# Altium PCB tmp235_Front_End_Siognal_Chain.PcbDoc
Units mil, origin at the board's own origin, x right, y up, seen from the top; angles counter-clockwise.
Board outline 2560 x 1190 mil, 5 copper layers (Top Layer, GND, 3V3, 5V, Bottom Layer), stack 24.902 mil thick; 35 components, 33 nets, 143 pads, 9 vias.
Unrouted connection lines stored in the file: 34.
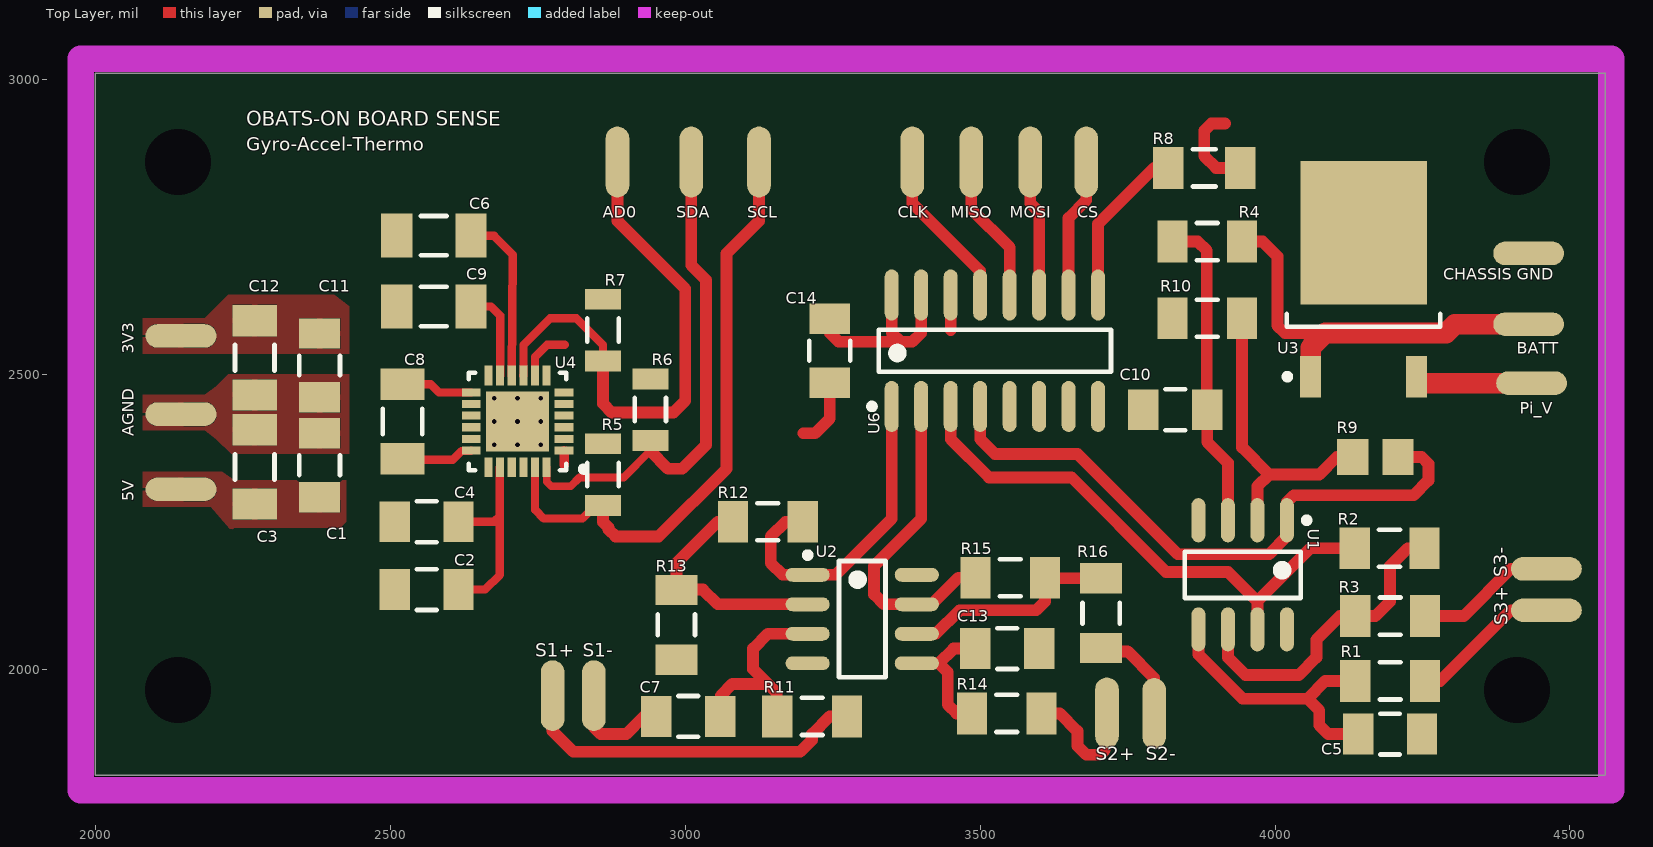
[diagram p0: Top Layer view]
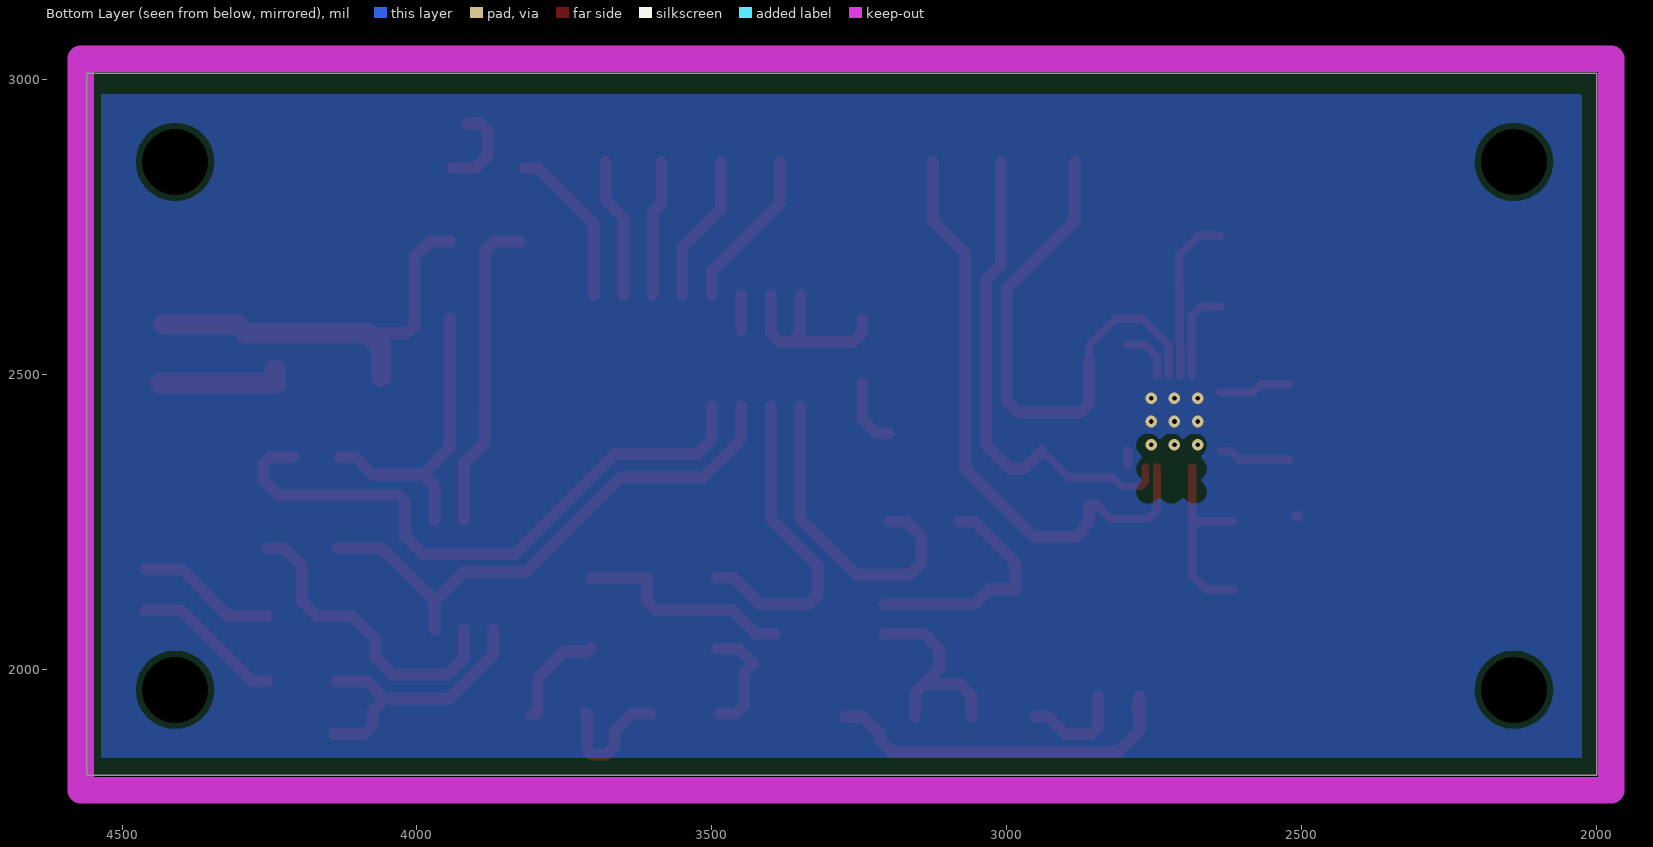
[diagram p1: Bottom Layer view, seen from below]
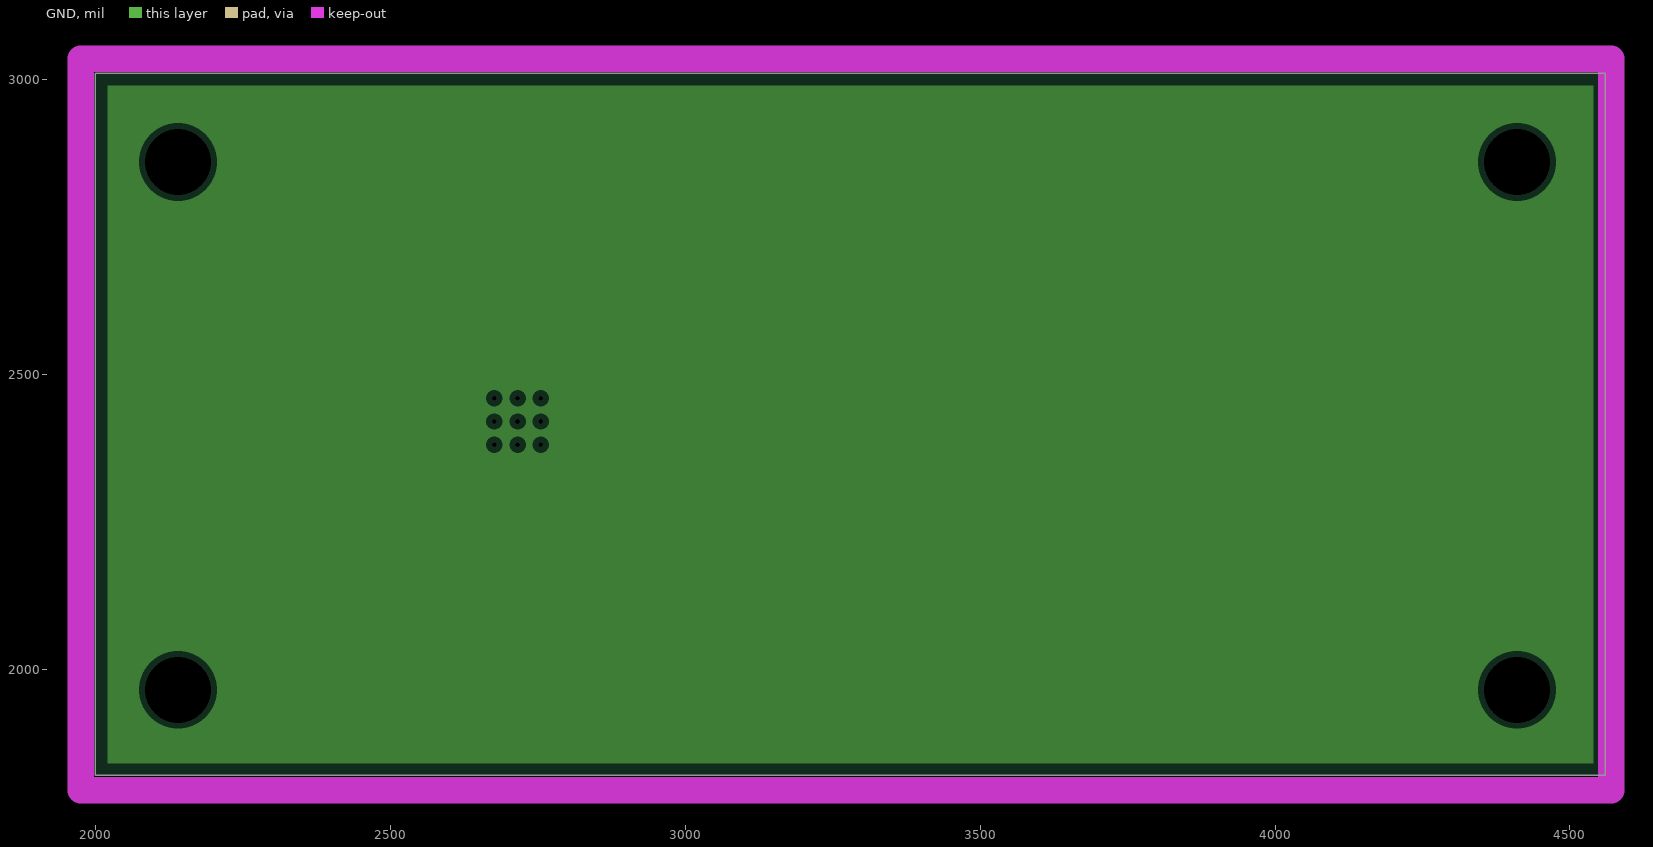
[diagram p2: GND, clearances drawn from the general rule]
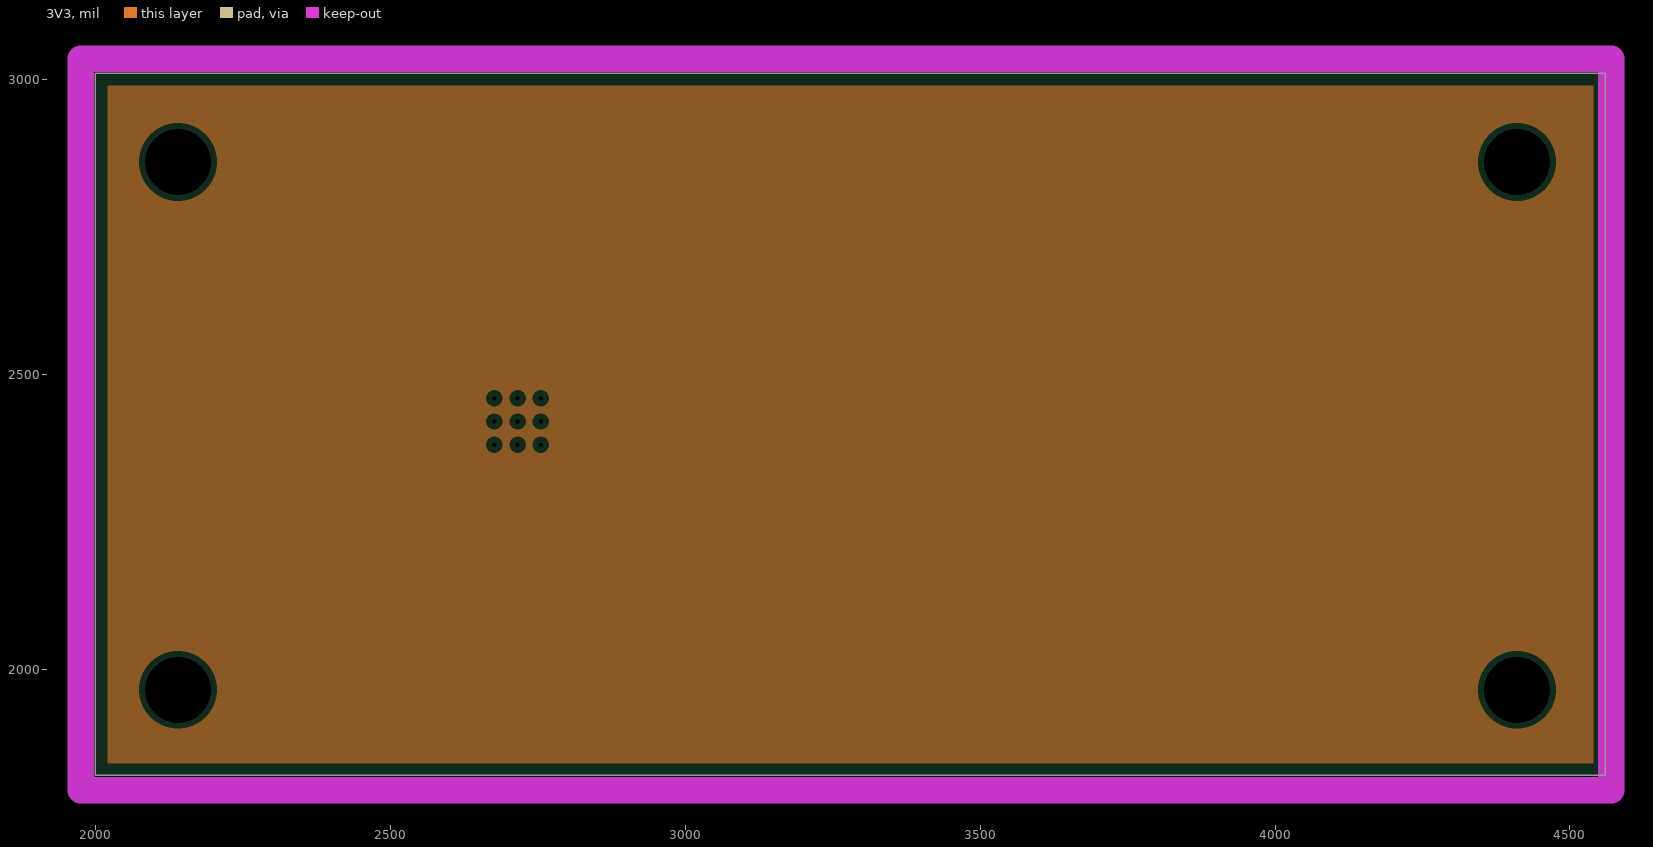
[diagram p3: 3V3, clearances drawn from the general rule]
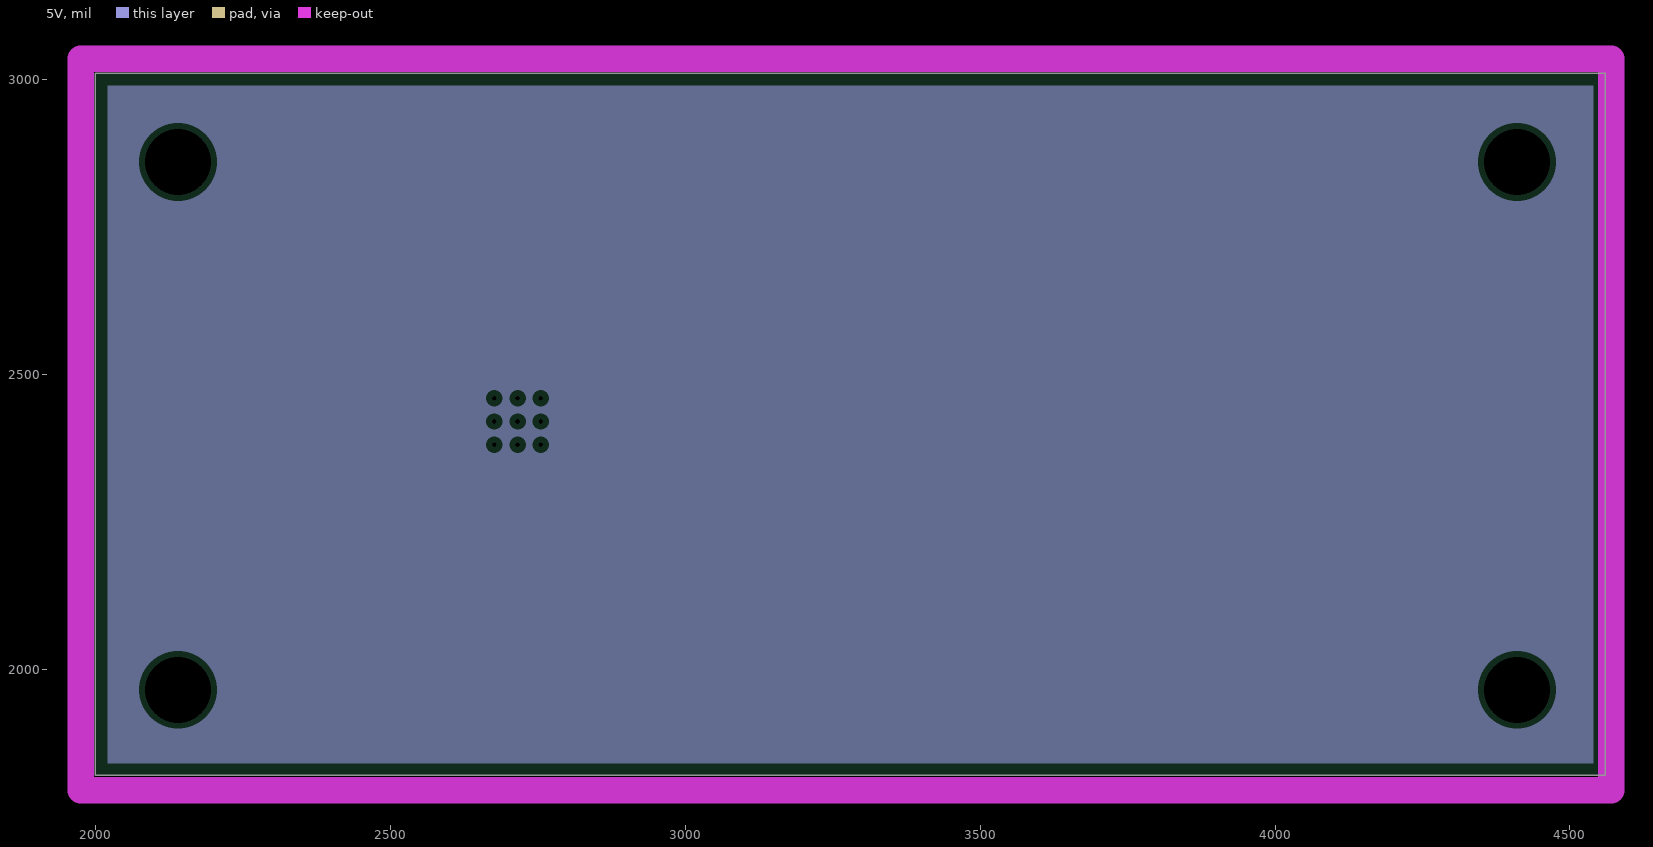
[diagram p4: 5V, clearances drawn from the general rule]

## Layer stack, top to bottom
Top Solder: solder mask 0.4, Solder Resist, Dk 3.5
Top Layer: signal copper 2.756
Dielectric 2: prepreg 2.8, PP-006, Dk 4.1
GND: plane copper 1.378, net AGND
Dielectric 1: dielectric 4.1, FR-4, Dk 4.8
3V3: plane copper 2.7559, net +3.3V_P
Dielectric 4: prepreg 2.8, PP-006, Dk 4.1
5V: plane copper 2.7559, net +5V_P
Dielectric 3: prepreg 2.8, PP-006, Dk 4.1
Bottom Layer: signal copper 2.756
Bottom Solder: solder mask 0.4, Solder Resist, Dk 3.5

## Board outline
2000,3010 2000,1820 4560,1820 4560,3010

## Design rules (kind name [scope] priority, off if disabled: settings)
Clearance Clearance_5 [InNamedPolygon('AGND_L05_P067')] p1: gap=10 ignorepadtopadclearanceinfootprint=FALSE except(0: Arc-Hole Track-Hole SMDPad-Hole THPad-Hole Via-Hole Fill-Hole Poly-Hole Region-Hole Text-Hole)
Clearance Clearance_4 [InNamedPolygon('AGND_L01_P065')] p2: gap=24 ignorepadtopadclearanceinfootprint=FALSE
Clearance Clearance_3 [InNamedPolygon('AGND_L01_P065')] p3: gap=30 ignorepadtopadclearanceinfootprint=FALSE
Clearance Clearance_2 [InNamedPolygon('AGND_L01_P065')] p4: gap=10 ignorepadtopadclearanceinfootprint=FALSE except(0: Arc-Hole Track-Hole SMDPad-Hole THPad-Hole Via-Hole Fill-Hole Poly-Hole Region-Hole Text-Hole)
Clearance Clearance_1 [InNamedPolygon('AGND_L01_P065')] p5: gap=10 ignorepadtopadclearanceinfootprint=FALSE except(0: Arc-Hole Track-Hole SMDPad-Hole THPad-Hole Via-Hole Fill-Hole Poly-Hole Region-Hole Text-Hole)
Clearance [All] p6 off: gap=10 ignorepadtopadclearanceinfootprint=FALSE except(0: Arc-Hole Track-Hole SMDPad-Hole THPad-Hole Via-Hole Fill-Hole Poly-Hole Region-Hole Text-Hole)
ComponentClearance [All] p1 off: gap=10 collisioncheckmode=3 verticalgap=10 showdistances=FALSE
Height [All] p1 off: minheight=0 maxheight=1000 prefheight=500
HoleSize [All] p1: absolutevalues=TRUE maxlimit=500 minlimit=1 maxpercent=80.000 minpercent=20.000
PlaneClearance [All] p1: clearance=10
PlaneConnect [All] p1: planeconnectstyle=Relief reliefexpansion=20 reliefentries=4 reliefconductorwidth=10 reliefairgap=10
PolygonConnect [All] p1 off: connectstyle=Relief reliefconductorwidth=10 reliefentries=4 polygonreliefangle="90 Angle" airgapwidth=10
RoomDefinition "Gyro Accel Temp MPU6050" [InComponentClass('Gyro Accel Temp MPU6050')] p1 off: confinementstyle=ConfineIn formatcopy=TRUE lockcomponents=FALSE outline 1935,1780 1990,1780 1990,1805 1935,1805
RoomDefinition ADC_MCP3008 [InComponentClass('ADC_MCP3008')] p2: confinementstyle=ConfineIn formatcopy=TRUE lockcomponents=FALSE outline 3420,2330 3370,2330 3370,2385 3420,2385
RoomDefinition Analog_Telem [InComponentClass('Analog_Telem')] p3 off: confinementstyle=ConfineIn formatcopy=TRUE lockcomponents=FALSE outline 1935,1765 1695,1765 1695,1545 1935,1545
RoutingVias [All] p1: holewidth=19 width=29 viastyle="Through Hole" minholewidth=10 minwidth=20 maxholewidth=35 maxwidth=50
SilkToSolderMaskClearance [IsPad] p1: minsilkscreentomaskgap=8 clearancetoexposedcopper=TRUE
SolderMaskExpansion [All] p1: expansion=4 istentingtop=FALSE
Width [All] p1 off: maxlimit=10 minlimit=10 preferedwidth=10
24 further rules are at their usual default settings.

## Classes and differential pairs
component class ADC_MCP3008: C14 R8 U6
component class "Gyro Accel Temp MPU6050": C2 C4 C6 C8 C9 C11 C12 R5 R6 R7 U4
component class Analog_Telem: C1 C3 C5 C7 C10 C13 R1 R2 R3 R4 R9 R10 R11 R12 R13 R14 R15 R16 U1 U2 U3

## Components (designator, comment, footprint, x,y, rotation, side; value= is the part's Value field where it differs from the comment)
C1 "1u" FP-CL31-IPC_B 2380,2345.81 r90 top
C2 "1u" FP-CL31-IPC_B 2561.44,2135 r180 top
C3 "0.1u" CAPC1206(3216)130_M 2270,2342.99 r270 top value=100nF
C4 "1u" FP-CL31-IPC_B 2561.44,2250 r180 top
C5 "1u" FP-CL31-IPC_B 4195,1890 r0 top
C6 "0.1u" CAPC1206(3216)130_M 2573.62,2735 r0 top value=100nF
C7 "1u" FP-CL31-IPC_B 3005,1920 r180 top
C8 "0.1u" CAPC1206(3216)130_M 2520.63,2420 r90 top value=100nF
C9 "0.1u" CAPC1206(3216)130_M 2573.62,2615 r0 top value=100nF
C10 "1u" FP-CL31-IPC_B 3830.81,2440 r180 top
C11 "1u" FP-CL31-IPC_B 2380,2515 r270 top
C12 "0.1u" CAPC1206(3216)130_M 2270,2527.99 r90 top value=100nF
C13 "1u" FP-CL31-IPC_B 3545.81,2035 r0 top
C14 "1u" FP-CL31-IPC_B 3245,2540 r270 top
R1 "10K" RESC3116X65X45ML10T20 4195,1980 r180 top
R2 "0" RESC3116X65X45ML10T20 4194.06,2205 r0 top
R3 "0" RESC3116X65X45ML10T20 4195,2090 r180 top
R4 "10K" RESC3116X65X45ML10T20 3885,2725 r180 top
R5 "4.7K" RESC3216X70X50LL05T20 2860.63,2330 r270 top
R6 "4.7K" RESC3216X70X50LL05T20 2940.63,2440 r270 top
R7 "4.7K" RESC3216X70X50LL05T20 2860.63,2575 r270 top
R8 "10" RESC3216X60X45ML10T20 3880,2850 r180 top
R9 "24K" RESC2013X70X40ML20T20 4170,2360 r0 top
R10 "10K" RESC3116X65X45ML10T20 3885,2595 r0 top
R11 "10K" RESC3116X65X45ML10T20 3215,1920 r180 top
R12 "0" RESC3116X65X45ML10T20 3140,2250 r180 top
R13 "0" RESC3116X65X45ML10T20 2985,2075 r90 top
R14 "10K" RESC3116X65X45ML10T20 3545,1925 r180 top
R15 "10K" RESC3116X65X45ML10T20 3550.94,2155 r0 top
R16 "0" RESC3116X65X45ML10T20 3705,2095 r90 top
U1 "OP284ESZ" ADI-R-8_L 3945,2160 r270 top
U2 "OP284ESZ" ADI-R-8_L 3300,2085 r0 top
U3 "L4941BDT-TR" TO-252_L 4150,2661.26 r90 top
U4 "MPU6050" INSE-QFN-24_V 2715.63,2420 r180 top
U6 "MCP3008T-I/SL" SOIC-SL16_N 3525,2540 r90 top

## Footprints (in the part's own frame and the unit in brackets; to place one, negate y for a bottom-side part, rotate by r counter-clockwise, add the part's x,y. Pads: shape width x height; smd on the part's side, far side on the other; paste and mask are expansions set on the pad)
ADI-R-8_L [mm] "SOIC, 8-Leads, Body 4.9x3.9mm, Pitch 1.27mm, IPC High Density"
  oval 1.9x0.6 smd: 1(-2.35,1.905) 2(-2.35,0.635) 3(-2.35,-0.635) 4(-2.35,-1.905) 5(2.35,-1.905) 6(2.35,-0.635) 7(2.35,0.635) 8(2.35,1.905)
  silkscreen extent -2.47,-2.5 1,2.88, body extent -2,-2.5 2,2.5, height 1.75
CAPC1206(3216)130_M [mm] "Chip Capacitor, Body 3.2x1.6mm, Height 1.3mm, IPC Low Density"
  rect 1.35x1.9 smd: 1(-1.6,0) 2(1.6,0)
  silkscreen extent -0.55,-0.85 0.55,0.85, body extent -1.7,-0.9 1.7,0.9, height 1.3
FP-CL31-IPC_B [mil]
  rect 51.4x69.22 smd paste+0 mask+0: 1(-54.19,0) 2(54.19,0)
  silkscreen extent -17,-35 17,35, body extent -90,-44 90,44, height 10
INSE-QFN-24_V [mm] "QFN, 24-Leads, Body 4.00x4.00mm, Pitch 0.50mm, Thermal Pad 2.7x2.6mm"
  rect 0.8x0.35 smd: 1(-2,1.25) 2(-2,0.75) 3(-2,0.25) 4(-2,-0.25) 5(-2,-0.75) 6(-2,-1.25) 13(2,-1.25) 14(2,-0.75) 15(2,-0.25) 16(2,0.25) 17(2,0.75) 18(2,1.25)
  rect 0.35x0.85 smd: 7(-1.25,-1.975) 8(-0.75,-1.975) 9(-0.25,-1.975) 10(0.25,-1.975) 11(0.75,-1.975) 12(1.25,-1.975) 19(1.25,1.975) 20(0.75,1.975) 21(0.25,1.975) 22(-0.25,1.975) 23(-0.75,1.975) 24(-1.25,1.975)
  rect 2.7x2.6 smd: 25(0,0)
  silkscreen extent -2.98,-2.1 2.1,2.17, body extent -2,-2 2,2, height 0.95
RESC2013X70X40ML20T20 [mm] "Chip Resistor, 2-Leads, Body 2.00x1.25mm, IPC Low Density"
  rect 1.35x1.55 smd: 1(-0.975,0) 2(0.975,0)
  body extent -1.1,-0.72 1.1,0.72, height 0.7
RESC3116X65X45ML10T20 [mm] "Chip Resistor, 2-Leads, Body 3.10x1.60mm, IPC Low Density"
  rect 1.3x1.8 smd: 1(-1.5,0) 2(1.5,0)
  silkscreen extent -0.45,-0.8 0.45,0.8, body extent -1.6,-0.85 1.6,0.85, height 0.65
RESC3216X60X45ML10T20 [mm] "Chip Resistor, 2-Leads, Body 3.20x1.60mm, IPC Low Density"
  rect 1.3x1.8 smd: 1(-1.55,0) 2(1.55,0)
  silkscreen extent -0.5,-0.8 0.5,0.8, body extent -1.65,-0.85 1.65,0.85, height 0.6
RESC3216X70X50LL05T20 [mm] "Chip Resistor, 2-Leads, Body 3.20x1.60mm, IPC High Density"
  rect 0.9x1.55 smd: 1(-1.325,0) 2(1.325,0)
  silkscreen extent -0.5,-0.67 0.5,0.67, body extent -1.63,-0.82 1.62,0.82, height 0.7
SOIC-SL16_N [mm] "SOIC, 16-Leads, Body 9.9x3.9mm, Pitch 1.27mm, IPC Medium Density"
  oval 2.2x0.6 smd: 1(-2.4,4.445) 2(-2.4,3.175) 3(-2.4,1.905) 4(-2.4,0.635) 5(-2.4,-0.635) 6(-2.4,-1.905) 7(-2.4,-3.175) 8(-2.4,-4.445) 9(2.4,-4.445) 10(2.4,-3.175) 11(2.4,-1.905) 12(2.4,-0.635) 13(2.4,0.635) 14(2.4,1.905) 15(2.4,3.175) 16(2.4,4.445)
  silkscreen extent -2.52,-5 0.9,5.42, body extent -2,-5 2,5, height 1.75
TO-252_L [mm] "D-PAK, 4-Leads, Body 6.1x6.5mm, Pitch 2.28mm, Lead Span 9.7mm, IPC High Density"
  rect 1.8x0.9 smd: 1(-4.2,2.28) 3(-4.2,-2.28)
  rect 6.2x5.45 smd: 4(2,0)
  silkscreen extent -4.32,-3.3 -1.5,3.4, body extent -2.05,-3.3 4.15,3.3, height 2.4

## Part data
C1 C2 C4 C5 C7 C10 C11 C13 C14: library part CMP-13271-001662-1, "Cap Ceramic 1uF 50V X7R ±10% SMD 1206 +125°C Embossed T/R", Capacitance=1uF, Case Code (Imperial)=1206, Case Code (Metric)=3216, Dielectric=X7R, Max Operating Temperature=125°C, Min Operating Temperature=-55°C, Package Quantity=1, Tolerance=10%, Voltage=50V, Case/Package=1206, Contact Plating=Tin, Depth=1.6mm, Height=1.6mm, Lead Free="Lead Free", Length=3.2mm, Material=Ceramic, Mount="Surface Mount", Packaging="Tape and Reel", Radiation Hardening=No, Thickness=0.071inch, Voltage Rating=50V, Voltage Rating (DC)=50V, Width=0.063inch
C3 C6 C8 C9 C12: library part CMP-1037-04215-1, "CAP 100nF 100V ±20% 1206 (3216 Metric) Thickness 1.3mm SMD", Case-EIA=1206, Case-Metric=3216, Rated Voltage="100 V", Tolerance=Â±20%, Max Thickness="1.3 mm", Technology=SMT
R1 R2 R3 R4 R10 R11 R12 R13 R14 R15 R16: library part CMP-2003-04910-1, Manufacturer=Yageo, Part Number=AC1206FR-0710KL
R5 R6 R7: library part CMP-2003-00848-1, Manufacturer=Panasonic, Part Number=ERJ8ENF4701V
R8: library part CMP-2003-04815-1, Manufacturer="Vishay Dale", Part Number=CRCW120610R0FKEA
R9: library part CMP-2001-00525-1, Manufacturer=Panasonic, Part Number=ERJ6ENF2402V
U1 U2: library part CMP-0384-00701-1, "Double Channel Single-Supply Operation Operational Amplifier, 4.25 MHz BW, 4 V/us SR, Industrial, 8-pin SOIC (R-8), Tube", Amplifiers Per Package=2, Generic Part Number=OP284, Input Bias Current=80nA, Input Offset Voltage=175uV, Manufacturer="Analog Devices", Code_JEDEC=MS-012-AA, ComponentLink1Description="Manufacturer URL", ComponentLink1URL=http://www.analog.com/en/index.html, ComponentLink2Description=Datasheet, ComponentLink2URL=http://www.analog.com/static/imported-files/data_sheets/OP184_284_484.pdf, ComponentLink3Description="Package Specification", ComponentLink3URL=http://www.analog.com/static/imported-files/packages/PKG_PDF/SOIC_Narrow%20(R)/R_8.pdf, DatasheetVersion="Rev. J", Iq/Amp=2mA, Mounting Technology="Surface Mount", PackageDescription="8-Pin Standard Small Outline Package, Body 3.9 x 4.9 mm, Pitch 1.27 mm", PackageReference=R-8, PackageVersion=060506-A, PartNumber=OP284ESZ, Slew Rate=4V/us, Small Signal Bandwidth=4.25MHz, V Span Max=36V, V Span Min=3V
U3: library part CMP-0244-00200-1, "1A Very Low Drop Regulator, 3-Pin DPAK, Tape and Reel", ComponentLink1Description="Manufacturer URL", ComponentLink1URL=http://www.st.com, ComponentLink2Description=Datasheet, ComponentLink2URL=http://www.st.com/internet/com/TECHNICAL_RESOURCES/TECHNICAL_LITERATURE/DATASHEET/CD00000443.pdf, DatasheetVersion=15/09/2006, PackageDescription="3-Pin Transistor Outline Package 2.28 mm Pitch, 9.7 mm Lead Span (DPAK)", PackageReference=TO-252, PackageVersion=2011
U4: library part CMP-1753-00002-1, "3-Axis Gyroscope, 3-Axis Accelerometer / , 2.375 to 3.46 V, -40 to 105 degC, 24-Pin QFN, RoHS, Tape and Reel", Case Code (Imperial)=0603, Case Code (Metric)=1608, Max Operating Temperature=155degC, Min Operating Temperature=-55degC, Package Quantity=5000, Power Rating="100 mW", Resistance="5.6 kohm", Tolerance=1%, Voltage Rating="75 V", Case/Package=0603, ComponentLink1Description="Manufacturer URL", ComponentLink1URL=http://www.invensense.com/, ComponentLink2Description=Datasheet, ComponentLink2URL=https://datasheet.ciiva.com/1513/1788002-1513632.pdf, DatasheetVersion="Rev. 3.4, 08/2013", Height="0.45 mm", Length="1.6 mm", Mount="Surface Mount", PackageDescription="24-Pin Quad Flat No-lead Package, Body 4 x 4 mm, Pitch 0.5 mm", PackageReference=QFN-24, Packaging="Tape and Reel", Pins=2, Radiation Hardening=No, REACH SVHC=Yes, RoHSCompliant=True, Width="0.8 mm"
U6: library part CMP-0188-00351-2, "2.7V 4-Channel/8-Channel 10-Bit A/D Converters with SPI Serial Interface, 16-Pin SOIC 150mil, Industrial Temperature, Tape and Reel", Code_IPC=SOIC127P600-16, Code_JEDEC=MS-012-AC, ComponentLink1Description="Manufacturer URL", ComponentLink1URL=http://www.microchip.com/, ComponentLink2Description=Datasheet, ComponentLink2URL=http://ww1.microchip.com/downloads/en/DeviceDoc/21295d.pdf, ComponentLink3Description="Package Specification", ComponentLink3URL=http://www.microchip.com/stellent/groups/techpub_sg/documents/packagingspec/en012702.pdf, DatasheetVersion="revD, Dec-2008", PackageDescription="16-Lead Plastic Small Outline (SL) - Narrow, 3.90mm Body [SOIC]", PackageReference=SOIC-SL16, PackageVersion="revBB, Aug-2009", RevisionNote="URLs added."

## Free pads (board coordinates)
  round 60 hole 112 unplated: 1(2140,2860) 1(4410,1965) 1(4410,2860) 2(2140,1965)
  oval 120x40 smd: 4(2145,2305) 4(2145,2432.5) 4(2145,2565) 4(4430,2585) 4(4430,2705) 4(4435,2485) 4(4460,2100) 4(4460,2170)
  oval 40x120 smd: 4(2775,1955) 4(2845,1955) 4(2885,2860) 4(3010,2860) 4(3125,2860) 4(3385,2860) 4(3485,2860) 4(3585,2860) 4(3680,2860) 4(3715,1926.01) 4(3795,1925)

## Via types
v1: diameter 19.68, hole 7.87, Top Layer to Bottom Layer, 9 vias

## Nets (pads, with @x,y where several pads share a name; then routed paths per layer and width w, separated by ;. In a path a pad name is that pad's centre, name@x,y a point inside that pad or via, vN(x,y) a via of type N, cw(c..) or ccw(c..) an arc to the next point about the centre after c; other vN are vias at no path point)
12V_BATT: pad.4@4430,2585 R4.1 U3.1 | length 709.9
  Top Layer w20: R4.1 3979.06,2725 4004.06,2700 4004.06,2582.66 4016.72,2570 4085,2570 ; U3.1@4054.88,2507.52 U3.1@4055.24,2507.17
  Top Layer w35: U3.1 4060.24,2545.24 4085,2570 4290,2570 4305,2585 pad.4@4430,2585
+3.3V_P: C8.2 C11.1 C12.2 pad.4@2145,2565 R5.1 R6.1 U4.8 U4.13 U6.6 | length 212.7
  Top Layer w14: C8.2 2568.62,2482.99 2582.29,2469.32 2636.78,2469.32 U4.13 ; U4.8 2745.16,2529.53 2765.63,2550 2795.63,2550
+5V_P: C1.1 C3.2 C14.1 pad.4@2145,2305 U1.8 U2.8 U6.8 U6.15 U6.16 | length 341.8
  Top Layer w20: C14.1 3245,2570 3260,2555 3365,2555 ; U6.16 3350,2570 3365,2555 ; U6.15 3400,2570 3385,2555 3365,2555
AGND: C1.2 C2.2 C3.1 C4.2 C5.2 C6.1 C7.2 C8.1 C9.1 C10.2 C11.2 C12.1 C13.2 C14.2 pad.4@2145,2432.5 pad.4@2845,1955 pad.4@3795,1925 pad.4@4460,2170 R3.1 R7.1 R8.1 R10.1 R13.1 R16.1 U1.4 U2.4 U4.1 U4.18 U6.5 U6.7 U6.14 | length 658.2
  Top Layer w14: C8.1@2520.63,2355 2605.63,2355 2620.63,2370 2636.1,2370 U4.18
  Top Layer w16: 2795,2345.63 U4.1@2795,2370.79
  Top Layer w20: C4.2@2507.26,2260 C4.2@2507.66,2259.59 ; 3200,2400 3220,2400 3245,2425 C14.2 ; 3450,2575 U6.14 ; R16.1 3710.94,2030 3750,2030 3795,1985 3795,1925 pad.4@3805,1922.01 ; 3915,2925 3891.72,2925 3880,2913.28 3880,2870 3900,2850 R8.1
DGND: R8.2 U6.9 | length 278.8
  Top Layer w20: U6.9 3700,2755 3795,2850 R8.2
GND: pad.4@4430,2705 U3.4
NetC2_1: C2.1 C4.1 U4.20 | length 336.8
  Top Layer w14: C2.1 2660.63,2135 2685.63,2160 2685.63,2260 ; C4.1 2675.63,2250 2685.63,2260 ; U4.20@2685.99,2342.13 2685.63,2341.77 2685.63,2260
NetC5_1: C5.1 R1.2 U1.5 | length 477.2
  Top Layer w20: U1.5 3870,2025 3945,1950 4055,1950 ; R1.2 4085,1980 4055,1950 ; C5.1 4090,1890 4075,1905 4075,1930 4055,1950
NetC6_2: C6.2 U4.10 | length 289.1
  Top Layer w14: C6.2 2675.93,2734.7 2707.36,2702.78 U4.10
NetC7_1: C7.1 R11.2 U2.3 | length 358.4
  Top Layer w20: C7.1 3060,1920.81 3060,1955 3080,1975 3140,1975 ; R11.2 3155,1920.94 3155,1960 3140,1975 ; U2.3 3140,2060 3115,2035 3115,2000 3140,1975
NetC9_2: C9.2 U4.11 | length 157.7
  Top Layer w14: C9.2 2670.63,2615 2686.1,2599.53 U4.11
NetC10_1: C10.1 R4.2 U1.3 | length 536.7
  Top Layer w20: R4.2 3869.06,2725 3884.06,2710 3884.06,2440.94 C10.1 3885,2385 3920,2350 U1.3
NetC13_1: C13.1 R14.2 U2.5 | length 195.4
  Top Layer w20: R14.2 3460,1925 3445,1940 3445,1995 3430,2010 3455,2035 C13.1
NetR1_1: pad.4@4460,2100 R1.1 | length 255.7
  Top Layer w20: R1.1 4280,1980 4400,2100 pad.4@4460,2100
NetR2_1: R2.1 U1.7 U6.3 | length 939.2
  Top Layer w20: U6.3 3450,2390 3515,2325 3655,2325 3815,2165 3920,2165 3970,2115 ; U1.7 3970,2115 ; R2.1 4060,2205 3970,2115
NetR2_2: R2.2 R3.2 U1.6 | length 534.8
  Top Layer w20: U1.6 3920,2020 3950,1990 4040,1990 4070,2020 4070,2050 4110,2090 R3.2 4170,2090 4195,2115 4195,2175 4225,2205 R2.2
NetR5_2: pad.4@3125,2860 R5.2 U4.23 | length 1042.7
  Top Layer w14: 2745.16,2270 U4.23 ; 2745.63,2270 2760,2255.63 2825.63,2255.63 R5.2@2847.83,2277.83
  Top Layer w20: R5.2@2847.83,2277.83 R5.2 2860.63,2249.37 2870,2240 2870,2236.72 2881.72,2225 2955,2225 3070,2340 3070,2705 3125,2760 pad.4@3125,2860
NetR6_2: pad.4@3010,2860 R6.2 U4.24 | length 841.9
  Top Layer w13: U4.24 2765.23,2341.85 2765.23,2317.62 2772.85,2310 2805.63,2310 2820.63,2325 2895.63,2325 2940.63,2370
  Top Layer w20: 2940.63,2370 2970.63,2340 2995,2340 3035,2380 3035,2660 3010,2685 pad.4@3010,2860
NetR7_2: pad.4@2885,2860 R7.2 U4.9 | length 931.1
  Top Layer w14: U4.9 U4.9 2725.51,2549.88 2770.63,2595 2815.63,2595 2860.63,2550 R7.2
  Top Layer w20: R7.2 2860.63,2450 2875.63,2435 2980,2435 3000,2455 3000,2645 2885,2760 pad.4@2885,2860
NetR9_1: R9.1 R10.2 U1.2 | length 523.8
  Top Layer w20: R10.2 3944.06,2375.94 3990,2330 ; U1.2 3970,2310 3990,2330 ; R9.1 4105,2360 4075,2330 4045,2330 3990,2330
NetR9_2: R9.2 U1.1 U6.4 | length 1067
  Top Layer w20: U6.4 3500,2390 3525,2365 3665,2365 3835,2195 3990,2195 4020,2225 U1.1 4020,2283.28 4031.72,2295 4235,2295 4260,2320 4260,2348.28 4248.28,2360 R9.2
NetR11_1: pad.4@2775,1955 R11.1 | length 628.4
  Top Layer w20: pad.4@2778.83,1931.17 2775,1955 2775,1895 2810,1860 3195,1860 3215,1880 3215,1890 3245,1920 R11.1
NetR12_1: R12.1 U2.1 U6.1 | length 552.6
  Top Layer w20: R12.1 3170,2250 3145,2225 3145,2180 3165,2160 U2.1 3255,2160 3350,2255 U6.1
NetR12_2: R12.2 R13.2 U2.2 | length 404.1
  Top Layer w20: R12.2 3055,2250 2985,2180 R13.2 2985.94,2135 3030,2135 3055,2110 U2.2
NetR14_1: pad.4@3715,1926.01 R14.1 | length 218.7
  Top Layer w20: R14.1 3635,1925 3665,1895 3665,1870 3680,1855 3703.28,1855 3711.17,1862.89 3711.17,1922.18 pad.4@3715,1926.01
NetR15_1: R15.1 U2.7 U6.2 | length 549.4
  Top Layer w20: U6.2 3400,2255 3320,2175 3320,2126.72 3336.72,2110 U2.7 3418.11,2110 3463.11,2155 R15.1
NetR15_2: R15.2 R16.2 U2.6 | length 375.7
  Top Layer w20: U2.6 3425,2060 3465,2100 3595,2100 3610,2115 R15.2 3610.94,2154.06 R16.2
NetU3_3: pad.4@4435,2485 U3.3 | length 217.6
  Top Layer w35: U3.3@4239.76,2507.4 U3.3 4239.76,2485 pad.4@4435,2485
NetU4_12: U4.12
NetU6_10: pad.4@3680,2860 U6.10 | length 237.9
  Top Layer w20: U6.10 3650,2765 3680,2795 pad.4@3680,2860
NetU6_11: pad.4@3585,2860 U6.11 | length 231.7
  Top Layer w20: pad.4@3585,2860 3585,2790 3600,2775 U6.11
NetU6_12: pad.4@3485,2860 U6.12 | length 252.4
  Top Layer w20: pad.4@3485,2860 3485,2780 3550,2715 U6.12
NetU6_13: pad.4@3385,2860 U6.13 | length 273.1
  Top Layer w20: pad.4@3385,2860 3385,2790 3500,2675 U6.13
pads on no net: U4.2 U4.3 U4.4 U4.5 U4.6 U4.7 U4.14 U4.15 U4.16 U4.17 U4.19 U4.21 U4.22 U4.25
copper on no net: | length 416.8
  Top Layer w20: 2845,1955 2845,1901.72 2856.72,1890 2900,1890 2930,1920 2950.81,1920 ; 3705,2035.94 3705.94,2035 ; 4254.06,2090 4320,2090 4400,2170 4460,2170
  other v1: 2676.26,2380.63 2715.63,2380.63 2755,2380.63 2676.26,2420 2715.63,2420 2755,2420 2676.26,2459.37 2715.63,2459.37 2755,2459.37

## Polygon pours and split planes (outlines as drawn)
no net on Top Layer "NONET_L01_P053" (solid, pour order 53): 2230,2464.19
AGND on Top Layer "AGND_L01_P059" (solid, pour order 59): 2080,2405 2080,2465 2185,2465 2205,2480 2225,2500 2430,2500 2430,2365 2230,2365 2210,2385 2205,2390 2185,2405
+3.3V_P on Top Layer "+3.3V_P_L01_P063" (solid, pour order 63): 2080,2535 2430,2535 2430,2615 2405,2635 2400,2635 2225,2635 2185,2595 2080,2595
+5V_P on Top Layer "+5V_P_L01_P061" (solid, pour order 61): 2080,2335 2215,2335 2235,2320 2425,2320 2425,2250 2415,2240 2235,2240 2230,2235 2195,2275 2080,2275
no net on Top Layer "NONET_L01_P029" (solid, pour order 29): 1920,2210
no net on Top Layer "NONET_L01_P030" (solid, pour order 30): 4497.5,2872.5
no net on Top Layer "NONET_L01_P038" (solid, pour order 38): 2655.63,2605
no net on Top Layer "NONET_L01_P039" (solid, pour order 39): 2075,2425
no net on Top Layer "NONET_L01_P043" (solid, pour order 43): 2075,2365
no net on Top Layer "NONET_L01_P049" (solid, pour order 49): 1710,2790
no net on Top Layer "NONET_L01_P052" (solid, pour order 52): 3840,3170
no net on Top Layer "NONET_L01_P057" (solid, pour order 57): 2500.63,2570
no net on Top Layer "NONET_L01_P062" (solid, pour order 62): 2075,2485
AGND on Bottom Layer "AGND_L05_P067" (solid, pour order 67): 2020,2975 4535,2975 4535,1850 2025,1850 2025,2970
no net on Bottom Layer "NONET_L05_P066" (solid, pour order 66): 2015,2980
AGND on GND (split plane): 4539.9,1840.1 2020.1,1840.1 2020.1,2989.9 4539.9,2989.9
+3.3V_P on 3V3 (split plane): 4539.9,1840.1 2020.1,1840.1 2020.1,2989.9 4539.9,2989.9
+5V_P on 5V (split plane): 4539.9,1840.1 2020.1,1840.1 2020.1,2989.9 4539.9,2989.9

## Keep-outs
Keep-Out Layer:
  lines w45: 1975,1795 4570,1795 4570,3035 1975,3035 1975,1795

## Silkscreen, mask and mechanical layers (free items; w line width, h text height)
Top Overlay:
  text "OBATS-ON BOARD SENSE" at 2256,2921 h25
  text "Gyro-Accel-Thermo" at 2256,2878.66 h23
  text "AD0" at 2860,2765 h20
  text "SDA" at 2985,2765 h20
  text "SCL" at 3105,2765 h20
  text "CLK" at 3360,2765 h20
  text "MISO" at 3450,2765 h20
  text "MOSI" at 3550,2765 h20
  text "CS" at 3665,2765 h20
  text "CHASSIS GND" at 4285,2660 h20
  text "3V3" at 2065,2535 h20 r90
  text "BATT" at 4410,2535 h20
  text "Pi_V" at 4415,2433.33 h20
  text "AGND" at 2065,2395 h20 r90
  text "5V" at 2065,2285 h20 r90
  text "S3-" at 4394,2156 h23 r90
  text "S3+" at 4394.18,2074.46 h23 r90
  text "S1+" at 2746,2021 h23
  text "S1-" at 2826,2021 h23
  text "S2+" at 3696,1846 h23
  text "S2-" at 3781,1846 h23